# EAGLE board ArduSensor-Fart (EAGLE 6.0)
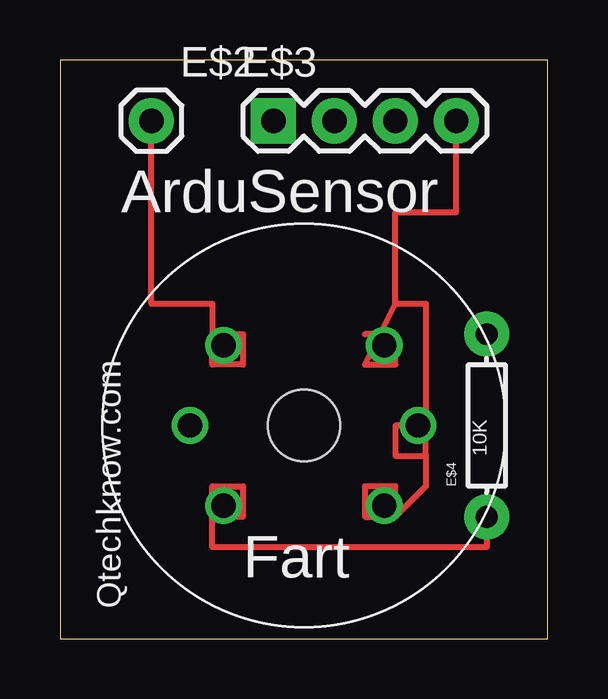
[diagram p0: board, top side]
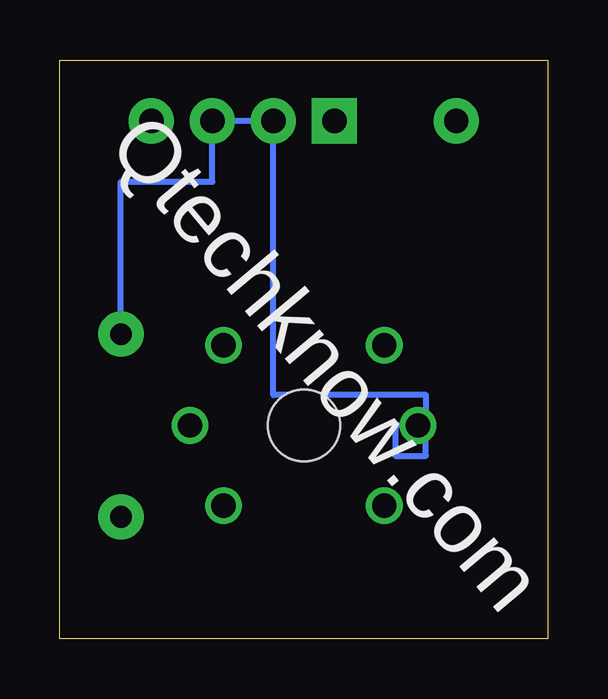
[diagram p1: board, bottom side, seen from below]

Size 20.32 x 24.13 mm. Coordinates in mm from the lower left corner, seen from the top.
Outline: 0,24.13 0,0 20.32,0 20.32,24.13 0,24.13
Copper layers (1*16): Top 0.035mm / dielectric 1.5mm / Bottom 0.035mm
Design rules: minimum track width 10mil, minimum drill 24mil, track to track 8mil, track to pad 8mil, pad to pad 8mil, via to via 8mil, smd to smd 8mil, copper to edge 40mil, drill to drill 8mil, minimum pad ring 10mil, minimum via ring 8mil, stop-mask expansion 4mil, vias tented up to drill 0mil, thermal gap 10mil

## Footprints (pad centres in the part's own frame; a part is rotated, then mirrored left to right if it is on the bottom)
MQ-3 = drill 1.016: A1 -3.35,3.35; A2 -3.35,-3.35; B1 3.35,3.35; B2 3.35,-3.35; HA -4.75,0; HB 4.75,0 | hole 3: 0,0
1X01 = drill 1.016 pad 1.88: 1 0,0
1X04 = drill 1.016 pad 1.88 square: 1 0,0 | drill 1.016 pad 1.88: 2 2.54,0; 3 5.08,0; 4 7.62,0
AXIAL-0.3 = drill 0.9 pad 1.88: P$1 -3.81,0; P$2 3.81,0

## Placement (x,y rotation side)
E$1  [MQ-3]  10.16,8.89 0 top
E$2  [1X01]  3.81,21.59 0 top
E$3  [1X04]  8.89,21.59 0 top
E$4  [AXIAL-0.3]  17.78,8.89 90 top

## Library data of the parts
E$1 = SFE Sensors
E$2 E$3 = SFE Connectors
E$4 = SFE Passives

## Nets
S$1: E$2.1
S$2: E$3.4
S$3: E$4.P$1
S$4: E$3.2 E$3.3 E$4.P$2

## Tracks (layer width: path | path; a pad name or v marks a point on that pad's centre or on a via)
S$1
  Top 0.254: E$2.1 3.81,13.97 6.35,13.97 6.35,12.7 | 6.35,12.7 7.62,12.7 7.62,11.43 6.35,11.43 6.35,12.7
S$2
  Top 0.254: 13.97,13.97 15.24,13.97 15.24,8.89 | 15.24,7.62 15.24,6.35 13.97,5.08 | 13.97,13.97 13.97,17.78 16.51,17.78 E$3.4 | 13.97,5.08 13.97,6.35 12.7,6.35 12.7,5.08 13.97,5.08 | 13.97,13.97 12.7,11.43 13.97,11.43 13.97,12.7 12.7,12.7 | 15.24,8.89 13.97,8.89 13.97,7.62 15.24,7.62 | 15.24,7.62 15.24,8.89
S$3
  Top 0.254: E$4.P$1 17.78,3.81 6.35,3.81 6.35,5.08 | 6.35,5.08 6.35,6.35 7.62,6.35 7.62,5.08 6.35,5.08
S$4
  Bottom 0.254: E$4.P$2 17.78,19.05 13.97,19.05 E$3.3 E$3.2 11.43,10.16 5.08,10.16 5.08,8.89 | 5.08,8.89 6.35,8.89 6.35,7.62 5.08,7.62 5.08,8.89

## Text on the board
tPlace: ArduSensor | 10K | Fart | Qtechknow.com
bPlace: Qtechknow.com